# Altium PCB mcu.PcbDoc
Units mil, origin at the board's own origin, x right, y up, seen from the top; angles counter-clockwise.
Board outline 1584.83 x 2372.23 mil, 2 copper layers (Top Layer, Bottom Layer), stack 12.8 mil thick; 75 components, 81 nets, 277 pads, 88 vias.
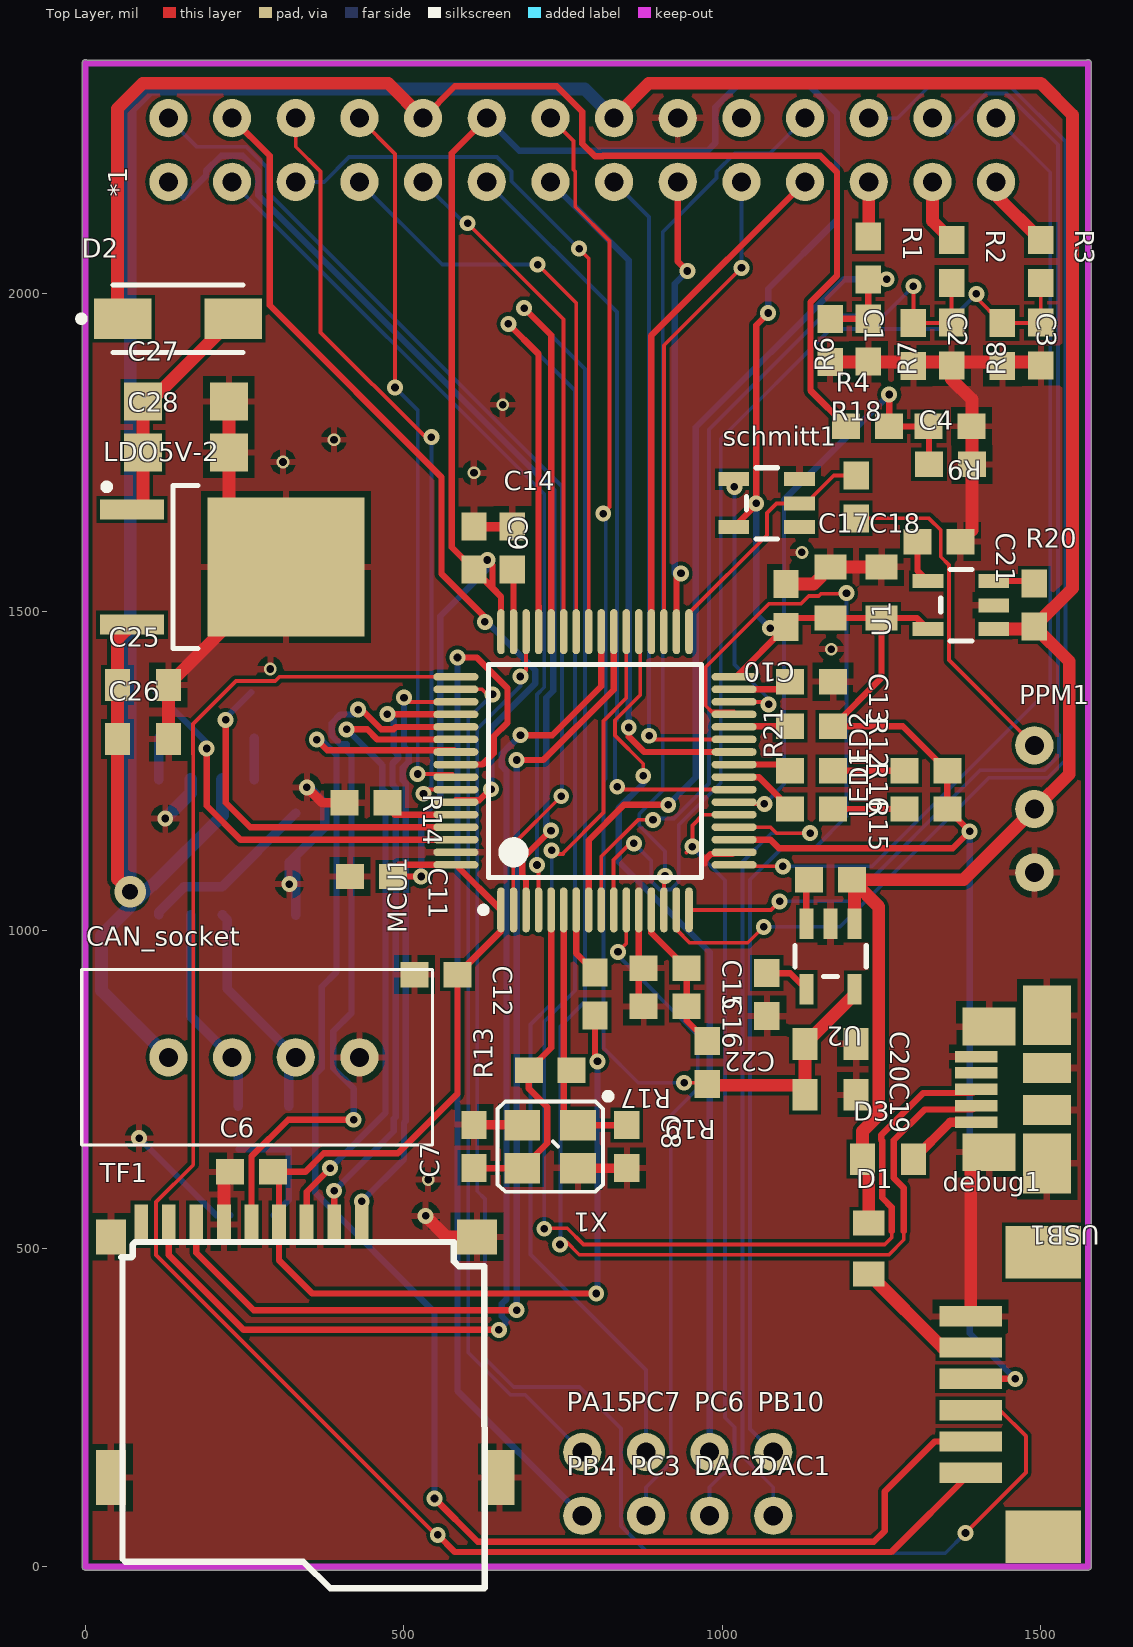
[diagram p0: Top Layer view]
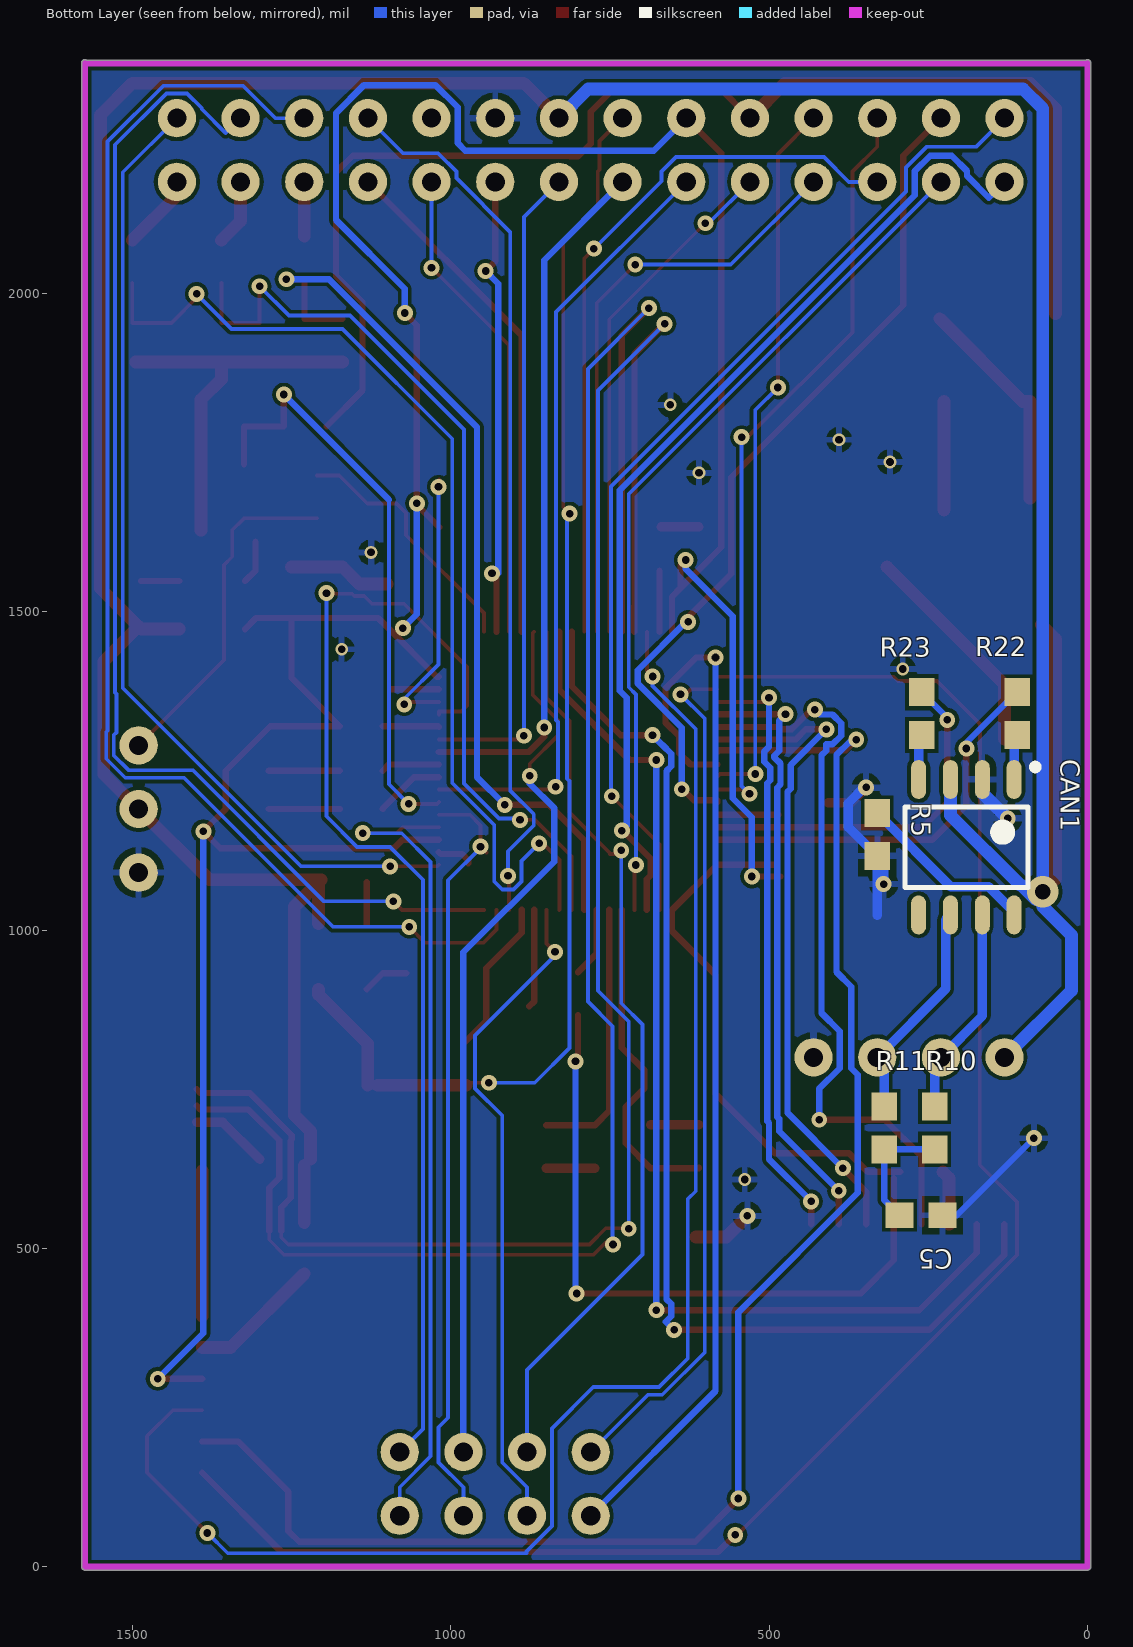
[diagram p1: Bottom Layer view, seen from below]

## Layer stack, top to bottom
Top Solder: solder mask 0.4, Solder Resist, Dk 3.5
Top Layer: signal copper 1.4
Dielectric 1: core 10, FR-4, Dk 4.2
Bottom Layer: signal copper 1.4
Bottom Solder: solder mask 0.4, Solder Resist, Dk 3.5

## Board outline
0,-5.02 cw(c0,0) -5.02,0 -5.02,2362.2 cw(c0,2362.2) 3.14,2366.12 1571.66,2366.12 cw(c1574.8,2362.2) 1579.82,2362.2 1579.82,0 cw(c1574.8,0) 1574.8,-5.02

## Design rules (kind name [scope] priority, off if disabled: settings)
Clearance [All] p1: gap=6
DiffPairsRouting [All] p1: maxlimit=10 minlimit=6 mostfreqgap=10 toplayer_minwidth=6 toplayer_maxwidth=15 toplayer_prefwidth=10 bottomlayer_minwidth=6 bottomlayer_maxwidth=15 bottomlayer_prefwidth=10 maxuncoupledlength=500
MinimumSolderMaskSliver [All] p1 off: minsoldermaskwidth=10
PolygonConnect [All] p1: connectstyle=Relief reliefconductorwidth=10 reliefentries=4 polygonreliefangle="90 Angle" airgapwidth=10
RoomDefinition power [InComponentClass('power')] p1 off: confinementstyle=ConfineIn formatcopy=TRUE lockcomponents=FALSE outline -2519.69,-2519.69 -519.69,-2519.69 -519.69,-1519.69 -2519.69,-1519.69
RoomDefinition mcu [InComponentClass('mcu')] p2 off: confinementstyle=ConfineIn formatcopy=TRUE lockcomponents=FALSE outline -2519.69,-2519.69 -519.69,-2519.69 -519.69,-1519.69 -2519.69,-1519.69
RoomDefinition interface [InComponentClass('interface')] p3 off: confinementstyle=ConfineIn formatcopy=TRUE lockcomponents=FALSE outline -2519.69,-2519.69 -519.69,-2519.69 -519.69,-1519.69 -2519.69,-1519.69
RoutingVias [All] p1: holewidth=12 width=25 viastyle="Through Hole" minholewidth=12 minwidth=25 maxholewidth=100 maxwidth=100
SilkToBoardRegionClearance [All] p1 off:
SilkToSilkClearance [All] p1 off: silktosilkclearance=10
SilkToSolderMaskClearance [IsPad] p1 off: minsilkscreentomaskgap=10 clearancetoexposedcopper=TRUE
SolderMaskExpansion [All] p1: expansion=4
UnpouredPolygon [All] p1: allowunpoured=FALSE
Width Width_1 [All] p1: maxlimit=25 minlimit=6 preferedwidth=10
Width Width-power [InNet('5V')] p2: maxlimit=25 minlimit=10 preferedwidth=15
Width Width-power_3 [InNet('3.3D')] p3: maxlimit=25 minlimit=15 preferedwidth=15
Width Width-power_2 [InNet('3.3A')] p4: maxlimit=25 minlimit=15 preferedwidth=15
Width Width-power_1 [InNet('5V')] p5: maxlimit=25 minlimit=15 preferedwidth=15
Width Width-power_4 [InNet('VBAT')] p6: maxlimit=25 minlimit=20 preferedwidth=20
24 further rules are at their usual default settings.

## Classes and differential pairs
component class power: C17 C18 C19 C20 C21 C22 C25 C26 C27 C28 LDO5V-2 R20 R21 U1 U2
component class mcu: C6 C7 C8 C9 C10 C11 C12 C13 C14 C15 C16 D1 D3 debug1 LED1 LED2 MCU1 PPM1 R12 R13 R14 R15 R16 R17 R18 R19 schmitt1 TF1 USB1 X1
component class interface: *1 C1 C2 C3 C4 C5 CAN1 CAN_socket D2 DAC1 DAC2 PA15 PB4 PB10 PC3 PC6 PC7 R1 R2 R3 R4 R5 R6 R7 R8 R9 R10 R11 R22 R23
differential pair CAN: +CAN_P -CAN_N
differential pair USB: +USB_P -USB_N

## Components (designator, comment, footprint, x,y, rotation, side; value= is the part's Value field where it differs from the comment)
*1 "MultiFunction" MultiFunction 330.31,2175.31 r90 top
C1 "47nF" 0603 1169.78,1926.31 r270 top
C2 "47nF" 0603 1300.31,1920.31 r270 top
C3 "47nF" 0603 1440.31,1920.31 r270 top
C4 "47nF" 0603 1358.31,1731.53 r0 top
C5 "100pF" 0603 261.31,552.31 r0 bottom
C6 "0.1uF" 0603 260.31,620.31 r0 top
C7 "20pF" 0603 610.31,660.31 r90 top
C8 "20pF" 0603 850.31,660.31 r270 top
C9 "0.1uF" 0603 610.31,1600.31 r270 top
C10 "0.1uf" 0603 1100.31,1510.31 r270 top
C11 "0.1uF" 0603 448.85,1084.31 r0 top
C12 "0.1uF" 0603 550.31,930.31 r0 top
C13 "2.2uf" 0603 1140.31,1390.31 r0 top
C14 "2.2uf" 0603 670.31,1600.31 r90 top
C15 "2.2uf" 0603 910.31,940.31 r0 top
C16 "0.1uf" 0603 910.31,880.31 r0 top
C17 "22uf" 0805 1170.31,1530.31 r90 top
C18 "22uf" 0805 1250.31,1530.31 r90 top
C19 "22uf" 0805 1170.31,741.5 r0 top
C20 "22uf" 0805 1170.31,821.5 r0 top
C21 "0.1uf" 0603 1340.31,1610.31 r0 top
C22 "0.1uF" 0603 1070.31,899.13 r270 top
C25 "22uf" 0805 90.31,1385.31 r0 top
C26 "22uf" 0805 90.31,1300.31 r0 top
C27 "10uF" 1206 90.31,1830.31 r0 top
C28 "10uF" 1206 90.31,1750.31 r0 top
CAN1 "TJA1050" SOIC8_39MM 190.31,1130.31 r270 bottom
CAN_socket "4PSocket" 4pSocket 230.31,800.31 r0 top
D1 "Diode" 0805 1230.31,500.31 r90 top
D2 "Diode" SMA 145.31,1960.31 r0 top
D3 "Diode" 0805 1260.31,640.31 r180 top
DAC1 "TestPad" TestPad 1080.31,80.31 r0 top
DAC2 "TestPad" TestPad 980.31,80.31 r0 top
debug1 "debug" WFRSM125 1390.31,295.31 r90 top
LDO5V-2 "78D05" TO-252-2L 230.31,1570.31 r0 top
LED1 "LED0" 0603 1320.31,1190.31 r180 top
LED2 "LED0" 0603 1320.31,1250.31 r180 top
MCU1 "STM32F103R8T6" LQFP64_N 800.31,1250.31 r90 top
PA15 "TestPad" TestPad 780.31,180.31 r0 top
PB4 "TestPad" TestPad 780.31,80.31 r90 top
PB10 "TestPad" TestPad 1080.31,180.31 r0 top
PC3 "TestPad" TestPad 880.31,80.31 r90 top
PC6 "TestPad" TestPad 980.31,180.31 r90 top
PC7 "TestPad" TestPad 880.31,180.31 r90 top
PPM1 "PPMIn" ServoConnector 1490.31,1090.31 r90 top
R1 "75k" 0603 1229.78,2056.31 r270 top
R2 "75k" 0603 1360.31,2050.31 r270 top
R3 "75k" 0603 1500.31,2050.31 r270 top
R4 "75k" 0603 1228.31,1791.53 r0 top
R5 "1k" 0603 330.31,1150.31 r270 bottom
R6 "15k" 0603 1229.78,1926.31 r90 top
R7 "15k" 0603 1360.31,1920.31 r90 top
R8 "15k" 0603 1500.31,1920.31 r90 top
R9 "15k" 0603 1358.31,1791.53 r180 top
R10 "Res2" 0603 240.31,689.31 r90 bottom
R11 "Res2" 0603 319.31,689.31 r90 bottom
R12 "10k" 0603 1140.31,1320.31 r0 top
R13 "NC" 0603 730.31,780.31 r180 top
R14 "10k" 0603 440.31,1200.31 r0 top
R15 "200R" 0603 1140.31,1190.31 r0 top
R16 "200R" 0603 1140.31,1250.31 r0 top
R17 "10k" 0603 800.31,900.31 r270 top
R18 "1k" 0603 1210.31,1680.31 r90 top
R19 "NC/ 10uH" 0603 976.31,792.31 r270 top
R20 "10k" 0603 1490.31,1510.31 r90 top
R21 "10k" 0603 1170.31,1079.13 r180 top
R22 "1k" 0603 110.31,1340.31 r90 bottom
R23 "1k" 0603 260.31,1340.31 r270 bottom
schmitt1 "schmitt_sot23-5" SOT23-5 1070.31,1670.31 r90 top
TF1 "TF" TF 40.31,140.31 r0 top
U1 "V_REG_LDOSMD" SOT23-5 1375.31,1510.31 r90 top
U2 "V_REG_LDOSMD" SOT23-5 1170.31,959.13 r180 top
USB1 "USB Micro Type B" MOLEX-47346-0001 1510.31,750.31 r180 top
X1 "8mhz" OSCILLATOR-3.2X2.5 730.31,660.31 r180 top

## Footprints (in the part's own frame and the unit in brackets; to place one, negate y for a bottom-side part, rotate by r counter-clockwise, add the part's x,y. Pads: shape width x height; smd on the part's side, far side on the other; paste and mask are expansions set on the pad)
4pSocket [mil]
  round 60 hole 30: 1(-100,0) 2(0,0) 3(100,0) 4(200,0)
  silkscreen extent -236,-138 315,138
0603 [mil] "0603-RES"
  rect 44x40 smd: 1(-33.46,0) 2(34,0)
0805 [mil]
  rect 39.37x50 smd: 1(-40,0) 2(40,0)
  body extent -50,-30 50,30, height 31
1206 [mil]
  rect 60x60 smd: 1(0,0) 2(135,0)
LQFP64_N [mm]
  oval 1.8x0.3 smd: 1(-5.55,3.75) 2(-5.55,3.25) 3(-5.55,2.75) 4(-5.55,2.25) 5(-5.55,1.75) 6(-5.55,1.25) 7(-5.55,0.75) 8(-5.55,0.25) 9(-5.55,-0.25) 10(-5.55,-0.75) 11(-5.55,-1.25) 12(-5.55,-1.75) 13(-5.55,-2.25) 14(-5.55,-2.75) 15(-5.55,-3.25) 16(-5.55,-3.75) 33(5.55,-3.75) 34(5.55,-3.25) 35(5.55,-2.75) 36(5.55,-2.25) 37(5.55,-1.75) 38(5.55,-1.25) 39(5.55,-0.75) 40(5.55,-0.25) 41(5.55,0.25) 42(5.55,0.75) 43(5.55,1.25) 44(5.55,1.75) 45(5.55,2.25) 46(5.55,2.75) 47(5.55,3.25) 48(5.55,3.75)
  oval 0.3x1.8 smd: 17(-3.75,-5.55) 18(-3.25,-5.55) 19(-2.75,-5.55) 20(-2.25,-5.55) 21(-1.75,-5.55) 22(-1.25,-5.55) 23(-0.75,-5.55) 24(-0.25,-5.55) 25(0.25,-5.55) 26(0.75,-5.55) 27(1.25,-5.55) 28(1.75,-5.55) 29(2.25,-5.55) 30(2.75,-5.55) 31(3.25,-5.55) 32(3.75,-5.55) 49(3.75,5.55) 50(3.25,5.55) 51(2.75,5.55) 52(2.25,5.55) 53(1.75,5.55) 54(1.25,5.55) 55(0.75,5.55) 56(0.25,5.55) 57(-0.25,5.55) 58(-0.75,5.55) 59(-1.25,5.55) 60(-1.75,5.55) 61(-2.25,5.55) 62(-2.75,5.55) 63(-3.25,5.55) 64(-3.75,5.55)
  silkscreen extent -5.67,-4.25 4.25,4.57
MOLEX-47346-0001 [mil] "MOLEX-47346-0001"
  rect 67x18 smd: 1(111,52) 2(111,26) 3(111,0) 4(111,-25.59) 5(111,-51.18)
  rect 75x94 smd: 5(0,117) 5(0,-116.14)
  rect 75x47 smd: 5(0,33) 5(0,-32.97)
  rect 83x59 smd: 5(91,99) 5(91,-98.43)
MultiFunction [mil]
  round 60 hole 30: 1(0,200) 2(0,100) 3(0,0) 4(0,-100) 5(0,-200) 6(0,-300) 7(0,-400) 8(0,-500) 9(0,-600) 10(0,-700) 11(0,-800) 12(0,-900) 13(0,-1000) 14(0,-1100) 15(100,-1100) 16(100,-1000) 17(100,-900) 18(100,-800) 19(100,-700) 20(100,-600) 21(100,-500) 22(100,-400) 23(100,-300) 24(100,-200) 25(100,-100) 26(100,0) 27(100,100) 28(100,200)
OSCILLATOR-3.2X2.5 [mil] "OSCILLATOR-3.2X2.5"
  rect 56x48 smd: 1(-43.31,-33.46) 2(44,-33.46) 3(44,34) 4(-43.31,34)
  silkscreen extent -95,-83 83,71
ServoConnector [mil]
  round 60 hole 30: 1(0,0) 2(100,0) 3(200,0)
SMA [mm]
  rect 2.3x1.6 smd: 1(-2.2,0) 2(2.2,0)
  silkscreen extent -3.97,-1.35 2.6,1.35
SOIC8_39MM [mm]
  oval 1.55x0.6 smd: 1(-2.7,1.905) 2(-2.7,0.635) 3(-2.7,-0.635) 4(-2.7,-1.905) 5(2.7,-1.905) 6(2.7,-0.635) 7(2.7,0.635) 8(2.7,1.905)
  silkscreen extent -3.32,-2.45 1.6,2.87
SOT23-5 [mil] "SOT23-5"
  rect 22x48 smd: 1(-37.4,-51.19) 2(0,-51.19) 3(38,-51.19) 4(38,52) 5(-37.4,52)
  silkscreen extent -56,-17 56,32
TestPad [mil]
  round 60 hole 30: 1(0,0)
TF [mm]
  rect 0.55x1.6 smd: 1(10,10.1) 2(8.9,10.1) 3(7.8,10.1) 4(6.7,10.1) 5(5.6,10.1) 6(4.5,10.1) 7(3.4,10.1) 8(2.3,10.1) 9(1.2,10.1)
  rect 1.2x2.2 smd: SHELL(0,0) SHELL(15.5,0)
  rect 1.2x1.4 smd: SHELL(0,9.6)
  rect 1.6x1.4 smd: SHELL(14.6,9.6)
  silkscreen extent 0.41,-4.42 14.9,9.4
TO-252-2L [mm]
  rect 2.55x0.8 smd: 1(-4,2.3) 3(-4,-2.3)
  rect 6.25x5.55 smd: 2(2.15,0)
  silkscreen extent -5.12,-3.25 -1.35,3.32
WFRSM125 [mm]
  rect 0.81x2.5 smd: 1(-3.75,0) 2(-2.5,0) 3(-1.25,0) 4(0,0) 5(1.25,0) 6(2.5,0)
  rect 2.1x3 smd: shell(-6.3,-2.9) shell(5.05,-2.9)
  body extent -6.79,-3.82 5.46,0.38, height 3.4

## Part data
C1 C2 C3 C4: library part C-USC0402, "电容"
C5 C6 C7 C8 C9 C10 C11 C12 C13 C14 C15 C16 C17 C18 C19 C20 C21 C22 C25 C26 C27 C28: library part CAP0402-CAP, "电容"
D1 D2 D3: "Default Diode"
LED1 LED2: "Typical INFRARED GaAs LED"
MCU1: "STM32 ARM-based 32-bit MCU with 64 Kbytes Flash, 64-pin LQFP, Industrial Temperature"
R1 R2 R3 R4 R6 R7 R8 R9 R20 R21: library part RESISTOR0402-RES, "电阻"
R5 R12 R13 R14 R15 R16 R17 R18 R19 R22 R23: library part Res2, "电阻"
R10 R11: "电阻"
U1 U2: "<b>Voltage Regulator LDO</b> / Standard 150mA LDO voltage regulator in SOT-23 layout. Micrel part MIC5205. BP (by-pass) pin is used to lower output noise with 470pF cap."
USB1: library part USB_Micro_TypeB, "Connector SMD USB Micro Type B middle mount"
X1: library part OSCILLATOR-3.2X2.5, "Crystal Oscillator in 3.2x2.5 SMD"

## Via types
v1: diameter 25, hole 12, Top Layer to Bottom Layer, 79 vias
v2: diameter 20, hole 12, Top Layer to Bottom Layer, 8 vias
v3: diameter 50, hole 25, Top Layer to Bottom Layer, 1 vias

## Nets (pads, with @x,y where several pads share a name; then routed paths per layer and width w, separated by ;. In a path a pad name is that pad's centre, name@x,y a point inside that pad or via, vN(x,y) a via of type N, cw(c..) or ccw(c..) an arc to the next point about the centre after c; other vN are vias at no path point)
3.3A: *1.22 C19.1 C20.1 R19.2 U2.5 | length 2011.4
  Top Layer w6: *1.22 766.31,2239.31 766.31,2194.47 769.31,2191.47 769.31,2136.31 823.31,2082.31 823.31,1664.31 v1(813.31,1654.31) ; v1(940.31,760.31) R19.2@974.31,760.31
  Top Layer w20: R19.2@976.31,756.31 C19.1@1115.5,756.31 ; C19.1@1130.31,756.31 C20.1 1207.72,898.9 U2.5
  Bottom Layer w6: v1(813.31,1654.31) 817.31,1650.31 817.31,1237.72 813.81,1234.22 813.81,814.81 868.31,760.31 v1(940.31,760.31)
3.3D: *1.23 C6.2 C9.2 C10.2 C11.2 C12.2 C17.1 C18.1 debug1.4 LED1.1 LED2.1 MCU1.1 MCU1.19 MCU1.32 MCU1.48 MCU1.64 R12.2 R17.2 schmitt1.5 TF1.4 U1.5 | length 7239.3
  Top Layer w10: C6.2 345.08,620.31 374.58,649.81 490.81,649.81 584.31,743.31 C12.2 652.68,998.68 MCU1.1 MCU1.64 C11.2@491.95,1102.68 ; C6.2@304.09,610.53 TF1.4 304.09,481.53 356.31,429.31 v1(802.31,429.31) ; C11.2 v1(527.31,1084.31) ; *1.23 575.31,2220.31 575.31,1601.31 C9.2 639.31,1537.31 ; v1(631.31,1581.31) 639.31,1573.31 639.31,1537.31 ; MCU1.48 652.68,1523.95 639.31,1537.31 ; R17.2 800.31,797.91 v1(804.28,793.94) ; schmitt1.5 1053.31,1667.91 v1(1053.31,1670.31) 1053.31,1950.31 v1(1072.31,1969.31) ; MCU1.19 1075.97,1142.05 1089.2,1128.81 1362.28,1128.81 v1(1388.78,1155.31) LED1.1 LED2.1 1283.78,1320.31 R12.2 1250.31,1396.31 C18.1 ; MCU1.32 1021.95,1397.95 C10.2 1114.31,1490.31 C17.1 C18.1 ; U1.5 1305.91,1490.31 C18.1 ; debug1.4 v1(1460.31,295.31)
  Bottom Layer w10: v1@532.31,1089.31 v1(527.31,1084.31) 527.31,1177.41 557.31,1207.41 557.31,1493.31 631.31,1567.31 v1(631.31,1581.31) ; *1.23 681.31,2224.31 977.31,2224.31 989.31,2236.31 989.31,2292.3 1024.33,2327.31 1136.3,2327.31 1180.31,2283.3 1180.31,2115.31 1072.31,2007.31 v1(1072.31,1969.31) ; v1(802.31,429.31) 804.28,431.28 v1(804.28,793.94) ; v1(1053.31,1670.31) 1053.31,1496.31 v1(1075.31,1474.31) ; v1(1388.78,1155.31) 1388.78,366.85 v1(1460.31,295.31)
5V: *1.21 C25.1 C26.1 CAN1.3 CAN_socket.1 D1.2 D3.2 LDO5V-2.3 PPM1.2 R20.1 R21.1 U1.1 U2.1 | length 5963.5
  Top Layer w20: v3(70.31,1060.31) 50.31,1080.31 C26.1 C25.1 50.31,1457.24 LDO5V-2.3 ; *1.21 885.31,2330.31 1500.31,2330.31 1550.31,2280.31 1550.31,1536.85 R20.1 1545.31,1421.85 1545.31,1245.31 PPM1.2 1379.13,1079.13 R21.1 R21.1@1207.72,1075.19 ; U2.1 R21.1@1207.72,1075.19 ; D3.2 1220.31,684.19 1246,709.87 1246,1036.91 R21.1@1207.72,1075.19 ; D1.2 D3.2@1230.31,630.31 ; U1.1 R20.1@1486.38,1472.91
  Bottom Layer w20: v3@81.95,1048.68 103.79,1070.53 105.53,1070.53 215.31,1180.31 CAN1.3 ; CAN_socket.1 25.31,905.31 25.31,992.05 70.31,1037.05 v3(70.31,1060.31) 70.31,2290.31 101.31,2321.31 784.31,2321.31 *1.21
CAN_N: CAN1.6 CAN_socket.3 R11.2 | length 352.9
  Bottom Layer w15: CAN1.6 222.81,1016.51 222.81,907.81 CAN_socket.3 319.31,789.31 R11.2
CAN_P: CAN1.7 CAN_socket.2 R10.2 | length 331.8
  Bottom Layer w15: CAN1.7 165.31,865.31 CAN_socket.2 240.31,790.31 R10.2
GND: *1.20 C1.2 C2.2 C3.2 C4.2 C5.1 C6.1 C7.2 C8.2 C9.1 C10.1 C11.1 C12.1 C13.2 C14.2 C15.1 C16.1 C17.2 C18.2 C19.2 C20.2 C21.2 C22.2 C25.2 C26.2 C27.2 C28.2 CAN1.2 CAN_socket.4 debug1.6 LDO5V-2.2 MCU1.12 MCU1.18 MCU1.63 PPM1.1 R5.2 R6.1 R7.1 R8.1 R9.1 R14.1 schmitt1.3 TF1.6 TF1.SHELL U1.2 U2.2 USB1.5 X1.2 X1.4 | length 2729.8
  Top Layer w10: MCU1.12 869.21,887.95 C16.1 ; 972.38,1105.38 972.38,1109.68 982.29,1119.58 1016.04,1119.58 MCU1.18
  Top Layer w15: v1(347.81,1224.28) 371.78,1200.31 R14.1 ; C7.2 X1.2@685.78,694.31 ; C9.1 C14.2@669.78,1633.78 ; X1.4 C8.2
  Top Layer w20: C26.2 C25.2 130.31,1385.67 LDO5V-2.2 ; TF1.6 217.48,610.94 C6.1 ; LDO5V-2.2@225.31,1659.96 C28.2 C27.2 ; v1(534.31,551.31) 567.36,518.27 TF1.SHELL@615.12,518.27 ; C10.1 1143.78,1543.78 C17.2 C18.2 ; C1.2 R8.1@1494.85,1892.31 ; R7.1 1360.31,1865.31 1392.31,1833.31 C4.2 C21.2@1392.31,1628.31 ; debug1.6 USB1.5@1390.31,622.31
  Bottom Layer w10: v1(84.31,673.31) 205.31,552.31 C5.1
  Bottom Layer w15: v1(320.31,1072.31) 320.31,1106.31 R5.2 ; 330.31,1023.78 R5.2 ; v1@346.31,1225.78 v1(347.81,1224.28) 350.91,1224.28 375.81,1199.37 375.81,1161.81 R5.2
  Bottom Layer w20: v1(125.31,1175.31) 165.31,1215.31 CAN1.2
  other v2: 538.31,608.31 290.31,1410.31 1171.31,1441.31 1125.31,1593.31 610.31,1718.31 310.31,1735.31 390.31,1770.31 655.31,1825.31
Net*1_1: *1.1 MCU1.3 | length 1575.2
  Top Layer w10: MCU1.3 692.05,1080.12 685.81,1086.35 685.81,1112.05 730.08,1156.31 v1(731.31,1156.31)
  Bottom Layer w10: *1.1 130.31,2175.08 154.95,2150.45 189.31,2184.82 189.31,2192.3 213.33,2216.31 247.3,2216.31 271.31,2192.3 271.31,2154.11 734.64,1690.79 734.64,1375.84 723.81,1365.01 723.81,1163.81 v1(731.31,1156.31)
Net*1_2: *1.2 MCU1.4 | length 1352.3
  Top Layer w6: v1(709.31,1102.31) 711.73,1099.9 MCU1.4
  Bottom Layer w6: *1.2 720.64,1684.99 720.64,1381.64 709.31,1370.31 v1(709.31,1102.31)
Net*1_3: *1.3 MCU1.41 | length 1137.5
  Top Layer w6: v1(775.31,2070.31) 790.47,2055.16 MCU1.41
  Bottom Layer w6: *1.3 375.16,2175.31 414.16,2214.31 646.47,2214.31 669.31,2191.47 669.31,2176.31 v1(775.31,2070.31)
Net*1_4: *1.4 MCU1.42 | length 935.4
  Top Layer w6: v1(710.31,2045.31) 770.79,1984.84 MCU1.42
  Bottom Layer w6: *1.4 560.31,2045.31 v1(710.31,2045.31)
Net*1_5: *1.5 MCU1.43 | length 800.9
  Top Layer w6: v1(600.31,2110.31) 751.1,1959.53 MCU1.43
  Bottom Layer w6: *1.5 595.31,2110.31 v1(600.31,2110.31)
Net*1_6: *1.6 MCU1.23 | length 1222.8
  Top Layer w6: v1(835.31,1225.31) 839.84,1220.79 MCU1.23
  Bottom Layer w6: *1.6 834.81,1970.81 834.81,1330.22 831.81,1327.22 831.81,1228.81 v1(835.31,1225.31)
Net*1_7: *1.7 MCU1.26 | length 1097.7
  Top Layer w10: v1(853.31,1318.31) 853.31,1304.08 877.55,1279.84 MCU1.26
  Bottom Layer w10: *1.7 853.31,2052.31 v1(853.31,1318.31)
Net*1_8: *1.8 MCU1.27 | length 1028.7
  Top Layer w6: v1(885.31,1305.31) 891.1,1299.53 MCU1.27
  Bottom Layer w6: *1.8 885.31,2120.31 v1(885.31,1305.31)
Net*1_9: *1.9 MCU1.34 | length 733.9
  Top Layer w10: MCU1.34 928.27,1553.27 v1(935.31,1560.31) ; *1.9 930.31,2050.31 v1(945.31,2035.31)
  Bottom Layer w10: v1(935.31,1560.31) 925.31,1560.31 925.31,2015.31 v1(945.31,2035.31)
Net*1_10: *1.10 MCU1.35 | length 756.9
  Top Layer w6: MCU1.35 908.58,1918.58 v1(1030.31,2040.31)
  Bottom Layer w6: v1(1030.31,2040.31) *1.10
Net*1_11: *1.11 MCU1.36 | length 806.5
  Top Layer w10: MCU1.36 888.9,1933.9 *1.11
Net*1_15: *1.15 MCU1.17 | length 1543.7
  Top Layer w6: MCU1.17 1021.18,1100.31 v1(1095.31,1100.31)
  Bottom Layer w6: v1(1095.31,1100.31) 1235.31,1100.31 1515.31,1380.31 1515.31,2190.31 *1.15
Net*1_16: *1.16 MCU1.16 | length 1910.6
  Top Layer w6: MCU1.16 1076.81,1031.81 v1(1090.31,1045.31)
  Bottom Layer w6: v1(1090.31,1045.31) 1199.28,1045.31 1405.28,1251.31 1506.47,1251.31 1529.31,1274.16 1529.31,1306.47 1525.31,1310.47 1525.31,1371.34 1527.31,1373.34 1527.31,2233.47 1446.47,2314.31 1414.16,2314.31 1391.31,2291.47 1391.31,2289.64 1353.65,2251.98 *1.16
Net*1_17: *1.17 MCU1.15 | length 2108.7
  Top Layer w6: MCU1.15 928.27,1000.89 948.84,980.31 1040.31,980.31 v1(1065.31,1005.31)
  Bottom Layer w6: v1(1065.31,1005.31) 1185.31,1005.31 1419.31,1239.31 1511.44,1239.31 1541.31,1269.19 1541.31,1311.44 1539.31,1313.44 1539.31,2238.44 1451.44,2326.31 1326.16,2326.31 1275.16,2275.31 *1.17
Net*1_18: *1.18 MCU1.14 | length 1401.2
  Top Layer w6: MCU1.14 908.58,1083.58 v1(910.31,1085.31)
  Bottom Layer w6: v1(910.31,1085.31) 910.31,1123.91 869.81,1164.41 869.81,1182.22 906.81,1219.22 906.81,2096.66 991.31,2181.16 991.31,2191.47 1020.16,2220.31 1075.31,2220.31 *1.18
Net*1_19: *1.19
Net*1_24: *1.24 D2.1 R4.1 | length 2036.9
  Top Layer w10: *1.24 580.31,2325.31 740.31,2325.31 780.31,2285.31 780.31,2235.31 800.31,2215.31 812.33,2215.31 813.33,2216.31 1154.31,2216.31 1180.31,2190.31 1180.31,2027.87 1138.78,1986.33 1138.78,1847.6 R4.1
  Top Layer w20: D2.1@50.31,1968.7 50.31,2290.31 90.31,2330.31 475.31,2330.31 *1.24
Net*1_25: *1.25 MCU1.57 | length 1129.9
  Top Layer w6: *1.25 486.31,2219.31 v1(486.31,1852.31) ; v1(521.81,1245.31) 531.31,1245.31 531.38,1245.25 577.03,1245.25 MCU1.57
  Bottom Layer w6: v1(486.31,1852.31) 521.81,1816.81 v1(521.81,1245.31)
Net*1_26: *1.26 MCU1.58 | length 1216.7
  Top Layer w6: *1.26 330.31,2230.47 369.31,2191.47 369.31,1938.91 533.91,1774.31 v1(543.31,1774.31) ; v1(530.98,1214.31) 529.31,1215.98 534.12,1220.79 MCU1.58
  Bottom Layer w6: v1(530.98,1214.31) 543.31,1226.65 v1(543.31,1774.31)
Net*1_27: *1.27 MCU1.59 | length 1341.3
  Top Layer w10: *1.27 289.31,2216.31 289.31,1981.52 559.31,1711.52 559.31,1559.76 v1@628.24,1490.83 ; MCU1.59 581.81,1203.88 618.34,1203.88 635.77,1221.31 v1(637.31,1221.31)
  Bottom Layer w10: v1(627.31,1484.31) 630.55,1484.31 706.64,1408.22 706.64,1387.44 637.31,1318.11 v1(637.31,1221.31)
Net*1_28: *1.28 MCU1.2 | length 1577.6
  Top Layer w6: MCU1.2 671.81,1031.81 671.81,1134.81 v1(747.31,1210.31)
  Bottom Layer w6: *1.28 175.31,2230.31 253.1,2230.31 285.31,2198.1 285.31,2159.91 748.64,1696.59 748.64,1211.64 v1(747.31,1210.31)
NetC1_1: C1.1 MCU1.8 R1.2 R6.2 | length 1414.3
  Top Layer w10: MCU1.8 790.47,1141.47 845.81,1196.81 v1(915.31,1196.81) ; C1.1@1170.31,1960.31 R6.2 R1.2 v1(1258.31,2022.31)
  Bottom Layer w10: v1(915.31,1196.81) 958.81,1240.31 958.81,1789.81 1191.31,2022.31 v1(1258.31,2022.31)
NetC2_1: C2.1 MCU1.9 R2.2 R7.2 | length 1450.3
  Top Layer w6: MCU1.9 810.16,1115.56 867.91,1173.31 v1(891.31,1173.31) ; v1(1300.31,2011.31) C2.1 1359.78,1953.78 R7.2 R2.2
  Bottom Layer w6: v1(891.31,1173.31) 893.31,1175.31 924.22,1175.31 979.31,1230.41 979.31,1786.31 1158.31,1965.31 1254.31,1965.31 v1(1300.31,2011.31)
NetC3_1: C3.1 MCU1.10 R3.2 R8.2 | length 1658.8
  Top Layer w6: MCU1.10 829.31,1032.34 829.31,1110.31 861.31,1142.31 v1(861.31,1136.31) ; v1(1399.31,1999.31) 1399.31,1993.31 1438.85,1953.78 C3.1 1499.78,1953.78 R8.2 R3.2
  Bottom Layer w6: v1(861.31,1136.31) 888.81,1108.81 888.81,1076.41 901.41,1063.81 919.22,1063.81 931.81,1076.41 931.81,1165.22 997.81,1231.22 997.81,1771.81 1170.31,1944.31 1344.31,1944.31 v1(1399.31,1999.31)
NetC4_1: C4.1 MCU1.22 R4.2 R9.2 | length 941.3
  Top Layer w6: MCU1.22 MCU1.22@1019.61,1200.31 ; MCU1.22@1021.61,1198.31 v1(1066.31,1198.31)
  Top Layer w10: R4.2 v1(1262.31,1841.31) ; R4.2@1262.85,1790.99 1324.85,1790.99 C4.1
  Bottom Layer w6: v1(1066.31,1198.31) 1097.31,1229.31 1097.31,1676.31
  Bottom Layer w10: 1097.31,1676.31 v1(1262.31,1841.31)
NetC5_2: C5.2 R10.1 R11.1 | length 192.5
  Bottom Layer w10: R10.1 R11.1 319.31,576.31 C5.2
NetC7_1: C7.1 MCU1.5 R13.2 X1.3 | length 524.5
  Top Layer w10: C7.1 610.85,626.31 X1.3 686.41,626.31 725.31,665.22 725.31,722.33 696.31,751.33 R13.2 731.42,815.42 MCU1.5
NetC8_1: C8.1 MCU1.6 R13.1 X1.1 | length 424.1
  Top Layer w10: MCU1.6 751.1,716.3 X1.1 C8.1
NetC13_1: C13.1 MCU1.31 | length 76
  Top Layer w10: MCU1.31 C13.1@1094.8,1378.27
NetC14_1: C14.1 MCU1.47 | length 96
  Top Layer w10: MCU1.47 C14.1@672.36,1564.8
NetC15_2: C15.2 C16.2 MCU1.13 R19.1 | length 242.2
  Top Layer w10: MCU1.13 888.9,995.73 C15.2 C16.2 944.31,857.78 R19.1
NetC21_1: C21.1 U1.4 | length 68.8
  Top Layer w10: C21.1 1306.85,1564.78 U1.4
NetC22_1: C22.1 U2.4 | length 72.5
  Top Layer w10: C22.1 1106.85,932.59 U2.4
NetCAN1_1: CAN1.1 R22.1 | length 65.2
  Bottom Layer w15: CAN1.1 R22.1@115.31,1301.85
NetCAN1_4: CAN1.4 R23.2 | length 64.7
  Bottom Layer w15: CAN1.4 R23.2@265.31,1301.31
NetCAN1_8: CAN1.8 R5.1 | length 283.8
  Bottom Layer w15: CAN1.8 115.31,1028.51 154.83,1068.03 214.56,1068.03 R5.1
NetD1_1: D1.1 debug1.5 | length 208
  Top Layer w20: D1.1 1346.1,344.53 debug1.5
NetD3_1: D3.1 USB1.1 | length 123
  Top Layer w15: D3.1 1358.31,698.31 USB1.1
NetDAC1_1: DAC1.1 MCU1.20 | length 1295.4
  Top Layer w6: MCU1.20 1076.09,1161.73 1085.5,1152.31 v1(1138.31,1152.31)
  Bottom Layer w6: DAC1.1 1080.31,125.16 1031.81,173.66 1031.81,1107 1077.13,1152.31 v1(1138.31,1152.31)
NetDAC2_1: DAC2.1 MCU1.21 | length 1213.6
  Top Layer w6: 943.81,1121.81 v1(953.31,1131.31) 953.31,1164.51 970.22,1181.42 MCU1.21
  Bottom Layer w6: v1(953.31,1131.31) 953.31,1129.31 1004.31,1078.31 1004.31,234.31 1019.31,219.31 1019.31,164.16 980.31,125.16 DAC2.1
Netdebug1_1: debug1.1 MCU1.49 | length 2826.1
  Top Layer w6: v1(553.31,50.31) 550.52,50.31 111.04,489.79 111.04,573.18 169.31,631.45 169.31,1275.91 168.81,1276.41 168.81,1323.81 236.31,1391.31 298.18,1391.31 304.82,1397.95 MCU1.49
  Top Layer w10: v1(553.31,50.31) 580.31,23.31 1265.95,23.31 debug1.1
Netdebug1_2: debug1.2 MCU1.55 | length 2499.1
  Top Layer w10: v1(363.31,1299.31) 380.01,1282.62 579.03,1282.62 MCU1.55 ; v1(548.31,107.31) 616.31,39.31 1238.31,39.31 1255.31,56.31 1255.31,118.31 1333.89,196.89 debug1.2
  Bottom Layer w10: v1(363.31,1299.31) 367.31,1299.31 371.31,1295.31 374.45,1295.31 393.95,1275.81 394.31,1275.81 394.31,934.33 371.31,911.33 371.31,783.33 360.81,772.83 360.81,587.37 548.31,399.87 v1(548.31,107.31)
Netdebug1_3: debug1.3 MCU1.46 | length 2459.6
  Top Layer w6: v1(683.14,1398.49) 692.05,1407.39 MCU1.46 ; v1(1382.31,53.31) 1477.31,148.31 1477.31,205.31 1436.53,246.1 debug1.3
  Bottom Layer w6: v1(683.14,1398.49) 683.14,1383.74 615.31,1315.91 615.31,590.09 627.81,577.59 627.81,327.31 672.81,282.31 776.31,282.31 841.31,217.31 841.31,64.16 881.31,24.16 881.31,21.31 1350.31,21.31 v1(1382.31,53.31)
NetLED1_2: LED1.2 R15.2 | length 112
  Top Layer w10: R15.2 LED1.2
NetLED2_2: LED2.2 R16.2 | length 112
  Top Layer w10: R16.2 LED2.2
NetMCU1_7: MCU1.7 R17.1 | length 110.3
  Top Layer w10: MCU1.7 770.79,963.31 R17.1
NetMCU1_11: MCU1.11 PC3.1 | length 1042.7
  Top Layer w6: v1(836.35,965.9) 849.53,979.08 MCU1.11
  Bottom Layer w6: v1(836.35,965.9) 836.35,960.28 961.81,834.81 961.81,751.41 919.31,708.91 919.31,164.16 880.31,125.16 PC3.1
NetMCU1_24: MCU1.24 R15.1 | length 109.2
  Top Layer w10: MCU1.24 1057.39,1240.47 1106.85,1191.01 R15.1
NetMCU1_25: MCU1.25 R16.1 | length 92.1
  Top Layer w10: MCU1.25 1097.01,1260.16 R16.1
NetMCU1_28: MCU1.28 R12.1 | length 88.5
  Top Layer w10: MCU1.28 1019.92,1320.31 R12.1
NetMCU1_29: MCU1.29 PB10.1 | length 1840
  Top Layer w6: MCU1.29 1018.82,1343.68 983.12,1343.68 974.38,1352.41 974.38,1413.38 1073.78,1512.78 1124.04,1512.78 1136.04,1524.78 1151.65,1524.78 1155.18,1528.31 1194.31,1528.31 v1(1195.31,1529.31)
  Bottom Layer w6: PB10.1 1043.81,216.81 1043.81,1079.22 1095.41,1130.81 1147.22,1130.81 1195.31,1178.91 v1(1195.31,1529.31)
NetMCU1_30: MCU1.30 schmitt1.4 | length 432.7
  Top Layer w6: schmitt1.4 1018.31,1696.31 v1(1019.31,1696.31) ; MCU1.30 1069.32,1358.58 v1(1073.14,1354.77)
  Bottom Layer w6: v1(1019.31,1696.31) 1019.31,1417.31 1073.14,1363.49 v1(1073.14,1354.77)
NetMCU1_33: MCU1.33 R18.2 schmitt1.2 | length 401.6
  Top Layer w6: MCU1.33 947.95,1497.95 1070.31,1620.31 1070.31,1655.31 1085.31,1670.31 schmitt1.2 1131.23,1670.31 1175.23,1714.31 R18.2
NetMCU1_37: MCU1.37 PC6.1 | length 1400.4
  Top Layer w6: MCU1.37 871.31,1466.72 871.31,1369.31 831.81,1329.81 831.81,1305.78 876.13,1261.47 v1(876.13,1242.29)
  Top Layer w10: v1(876.13,1242.29) v1@877.1,1241.31
  Bottom Layer w10: v1(876.13,1242.29) 876.13,1230.13 837.81,1191.81 837.81,1107.61 980.31,965.11 PC6.1
NetMCU1_38: MCU1.38 PC7.1 | length 1447.7
  Top Layer w6: v1(732.31,1125.31) 738.16,1119.47 750.51,1119.47 750.51,1121.31 813.81,1184.61 813.81,1328.78 849.53,1364.5 MCU1.38
  Bottom Layer w6: v1@734.31,1127.31 v1(732.31,1125.31) 732.31,885.28 699.07,852.04 699.07,490.56 880.31,309.31 PC7.1
NetMCU1_39: MCU1.39 TF1.7 | length 1738.3
  Top Layer w10: TF1.7 174.17,493.46 264.31,403.31 v1(677.31,403.31) ; v1(677.31,1267.31) 719.31,1267.31 829.84,1377.84 MCU1.39
  Bottom Layer w10: v1(677.31,403.31) v1(677.31,1267.31)
NetMCU1_40: MCU1.40 TF1.8 | length 1821
  Top Layer w10: TF1.8 130.87,489.76 248.31,372.31 v1(649.31,372.31) ; v1(683.31,1306.31) 733.31,1306.31 810.16,1383.16 MCU1.40
  Bottom Layer w10: v1(649.31,372.31) 662.2,385.2 653.81,393.58 653.81,413.05 661.31,420.55 661.31,1250.08 653.81,1257.58 653.81,1277.05 667.58,1290.81 667.81,1290.81 v1(683.31,1306.31)
NetMCU1_50: MCU1.50 PA15.1 | length 1353.8
  Top Layer w6: MCU1.50 623.36,1378.27 631.31,1370.31 v1(639.31,1370.31)
  Bottom Layer w6: v1(639.31,1370.31) 601.31,1332.31 601.31,336.84 667.84,270.31 690.31,270.31 PA15.1
NetMCU1_51: MCU1.51 TF1.1 | length 949.5
  Top Layer w6: v1(500.31,1365.31) 507.05,1358.58 MCU1.51
  Top Layer w10: TF1.1 v1(434.01,574.01)
  Bottom Layer w10: v1(434.01,574.01) 500.31,640.31 500.31,697.06 503.31,700.06 503.31,1230.58 498.31,1235.58 498.31,1255.05 507.81,1264.55 507.81,1280.68 500.31,1288.18 v1(500.31,1365.31)
NetMCU1_52: MCU1.52 TF1.2 | length 962.3
  Top Layer w10: TF1.2 v1(390.71,590.71) ; v1(474.31,1339.31) 474.73,1338.9 MCU1.52
  Bottom Layer w10: v1(390.71,590.71) 484.31,684.31 484.31,703.69 487.31,706.69 487.31,1223.95 482.31,1228.95 482.31,1261.68 491.81,1271.18 491.81,1274.05 484.31,1281.55 484.31,1329.31 v1(474.31,1339.31)
NetMCU1_53: MCU1.53 TF1.5 | length 1175.4
  Top Layer w10: TF1.5 260.79,644.79 318.31,702.31 v1(421.31,702.31) ; v1(428.31,1346.31) 434.08,1346.31 464.58,1315.81 484.05,1315.81 487.45,1319.21 MCU1.53
  Bottom Layer w10: v1(421.31,702.31) 421.31,751.33 389.31,783.33 389.31,841.31 417.81,869.81 417.81,1274.58 410.31,1282.08 410.31,1291.81 400.58,1291.81 386.81,1305.58 386.81,1325.05 400.58,1338.81 420.81,1338.81 v1(428.31,1346.31)
NetMCU1_54: MCU1.54 TF1.3 | length 1032
  Top Layer w10: TF1.3 347.4,589.4 v1(384.31,626.31) ; v1(410.31,1315.31) 442.45,1315.31 458.24,1299.53 MCU1.54
  Bottom Layer w10: v1(384.31,626.31) 471.31,713.31 471.31,1217.33 466.31,1222.33 466.31,1259.31 v1(410.31,1315.31)
NetMCU1_56: MCU1.56 PB4.1 | length 1705.6
  Top Layer w10: MCU1.56 623.52,1260.16 641.31,1277.95 641.31,1304.31 662.81,1325.81 662.81,1380.05 614.55,1428.31 v1(584.31,1428.31)
  Bottom Layer w10: v1(584.31,1428.31) 584.31,276.31 PB4.1
NetMCU1_60: MCU1.60 R14.2 | length 96.4
  Top Layer w10: R14.2@485.42,1181.42 MCU1.60
NetMCU1_61: MCU1.61 R23.1 | length 567.5
  Top Layer w10: v1(220.31,1330.31) 220.31,1200.31 258.9,1161.73 MCU1.61
  Bottom Layer w10: v1(220.31,1330.31) 220.31,1333.78 R23.1
NetMCU1_62: MCU1.62 R22.2 | length 625.7
  Top Layer w10: v1(190.31,1285.31) 190.31,1195.31 243.58,1142.05 MCU1.62
  Bottom Layer w10: R22.2 190.31,1294.31 v1(190.31,1285.31)
NetPPM1_3: PPM1.3 R18.1 | length 539.7
  Top Layer w6: R18.1 1325.04,1646.85 1343.31,1628.58 1343.31,1586.59 1356.31,1573.59 1356.31,1424.31 PPM1.3
NetR20_2: R20.2 U1.3 | length 59.8
  Top Layer w10: U1.3 R20.2@1486.31,1548.31
NetR21_2: R21.2 U2.3 | length 64.8
  Top Layer w10: U2.3 R21.2@1132.31,1075.13
USB_N: MCU1.44 USB1.2 | length 2927
  Top Layer w6: v1(745.31,506.31) 749,510 756,510 775.69,490.31 1261.94,490.31 1285.31,513.69 1285.31,527.31
  Top Layer w10: v1(689.06,1977.06) 731.57,1934.55 731.57,1509.41 731.42,1509.25 MCU1.44 ; 1285.31,527.31 1285.31,595.07 1269.63,610.76 1269.63,669.87 1318.07,718.31 1393.31,718.31 USB1.2
  Bottom Layer w6: v1(689.06,1977.06) 784.81,1881.31 784.81,887.81 746.07,849.07 746.07,507.07 v1(745.31,506.31)
USB_P: MCU1.45 USB1.3 | length 2896.2
  Top Layer w6: v1(720.57,531.06) 721.32,531.81 756.81,531.81 782.31,506.31 1255.31,506.31 1266.31,517.31 1266.31,527.31
  Top Layer w10: v1(664.31,1952.31) 711.57,1905.05 711.57,1509.41 711.73,1509.25 MCU1.45 ; 1266.31,527.31 1266.31,564.56 1251.31,579.56 1251.31,669.56 1249.63,671.24 1249.63,678.15 1315.79,744.31 1393.31,744.31 USB1.3
  Bottom Layer w6: v1(664.31,1952.31) 768.81,1847.81 768.81,904.81 720.57,856.57 v1(720.57,531.06)
VA.: *1.12 R1.1 | length 85
  Top Layer w20: R1.1@1230.31,2090.31 *1.12
VB.: *1.13 R2.1 | length 104
  Top Layer w20: *1.13 1330.31,2113.78 R2.1
VBAT: C27.1 C28.1 D2.2 LDO5V-2.1 | length 347.4
  Top Layer w20: 90.31,1678.35 C28.1 C27.1 101.93,1830.31 D2.2
VC.: *1.14 R3.1 | length 120.5
  Top Layer w20: *1.14 1430.31,2153.78 R3.1
pads on no net: CAN1.5 debug1.shell schmitt1.1 TF1.9 USB1.4

## Polygon pours and split planes (outlines as drawn)
GND on Top Layer "Top Layer-No Net" (solid, remove dead copper, pour order 4): 0,2361.1 1574.8,2361.1 1574.8,0 0,0
GND on Bottom Layer "Top Layer-No Net" (solid, remove dead copper, pour order 6): 0,2361.1 1574.8,2361.1 1576.72,2359.18 1576.72,-4.43 4.43,-4.43 0,0

## Keep-outs
Keep-Out Layer:
  lines w10: 0,2361.1 1574.8,2361.1 ; 0,2362.2 0,0 1574.8,0 1574.8,2362.2

## Text inside footprints (layer, text, board x,y; h text height)
CAN1: Mechanical 15 "1" at 196.78,1112.6 h29.53